# EAGLE board single valve board (EAGLE 9.2.2)
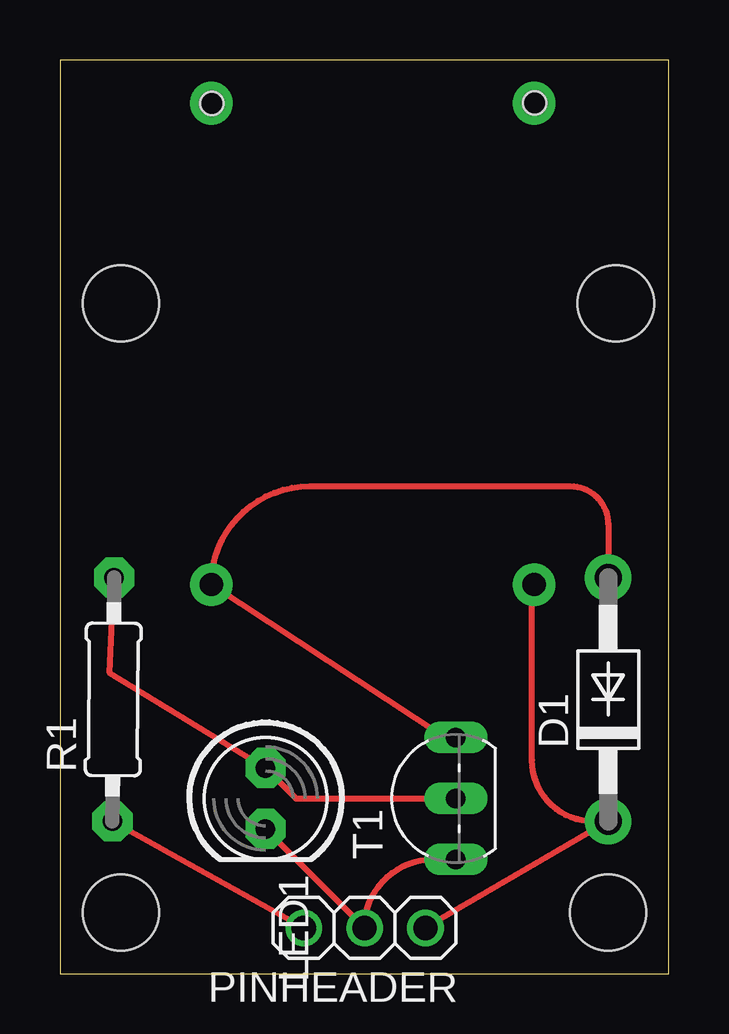
[diagram p0: board, top side]
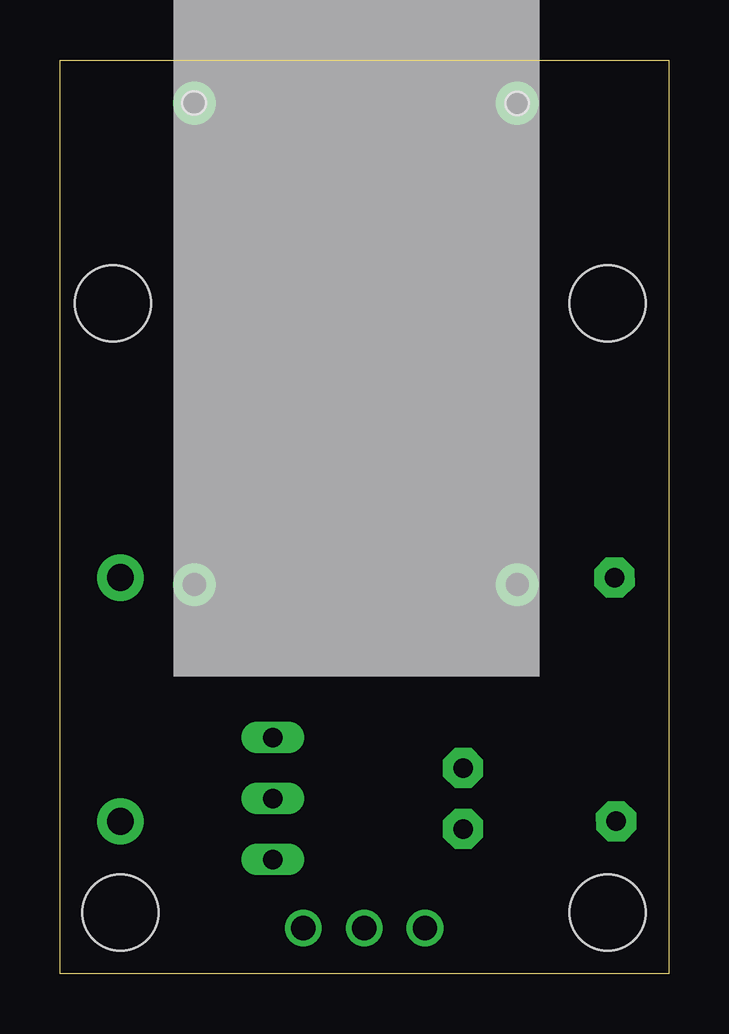
[diagram p1: board, bottom side, seen from below]

Size 25.38 x 38.09 mm. Coordinates in mm from the lower left corner, seen from the top.
Outline: 0,0 25.38,0 25.38,38.09 0,38.09 0,0
Copper layers (1*16): Top 0.035mm / dielectric 1.5mm / Bottom 0.035mm
Design rules "default": minimum track width 6mil, minimum drill 0.35mm, track to track 6mil, track to pad 6mil, pad to pad 6mil, via to via 6mil, smd to smd 6mil, copper to edge 40mil, drill to drill 6mil, minimum pad ring 10mil, minimum via ring 8mil, stop-mask expansion 4mil, vias tented up to drill 0mil, thermal gap 10mil
Holes 3.17 mm at 2.54,27.94 23.18,27.94 22.86,2.54 2.54,2.54
Holes 0.97 mm at 6.32,36.27 19.79,36.3

## Footprints (pad centres in the part's own frame; a part is rotated, then mirrored left to right if it is on the bottom)
DO41-10 = drill 1.118 pad 1.93: A 5.08,0; C -5.08,0
LED5MM = drill 0.813 pad 1.676 octagon: A -1.27,0; K 1.27,0
1X03 = drill 1.016: 1 -2.54,0; 2 0,0; 3 2.54,0
0207/10 = drill 0.813 pad 1.676 octagon: 1 -5.08,0; 2 5.08,0
VALVTEST2 = drill 0.965 pad 1.778: PAD10 -10.135,6.756; PAD11 -10.135,-6.706; PAD12 9.931,-6.706; PAD13 9.931,6.756
TO92-EBC-OVAL = drill 0.813 long: B 0,-1.27; C 2.54,-1.27; E -2.54,-1.27

## Placement (x,y rotation side)
D1  1N4004  [DO41-10]  22.86,11.43 90 top
LED1  [LED5MM]  8.57,7.3 270 top
PINHEADER  [1X03]  12.7,1.91 180 top
R1  220  [0207/10]  2.22,11.43 89.6 top
SOLENOID1  SOLENOID1  [VALVTEST2]  13.02,26.35 90 bottom
T1  2N2222  [TO92-EBC-OVAL]  15.24,7.3 90 top

## Library data of the parts
D1 LED1 PINHEADER R1 T1 = adafruit
SOLENOID1 = local eagle library

## Nets
5V: D1.C PINHEADER.1 SOLENOID1.PAD10
CNTRLSIG1: PINHEADER.3 R1.1
GND: LED1.K PINHEADER.2 T1.E
N$1: D1.A SOLENOID1.PAD11 T1.C
N$2: LED1.A R1.2 T1.B

## Tracks (layer width: path | path; a pad name or v marks a point on that pad's centre or on a via)
5V
  Top 0.254: PINHEADER.1 D1.C 22.23,6.35 arc-90 19.68,8.89 19.68,16.45 arc-90 19.77,16.54
CNTRLSIG1
  Top 0.254: PINHEADER.3 R1.1
GND
  Top 0.254: T1.E 15.56,4.76 arc90 PINHEADER.2 LED1.K
N$1
  Top 0.254: T1.C 16.03,9.84 SOLENOID1.PAD11 arc-90 10.41,20.32 21.27,20.32 arc-90 22.86,18.73 D1.A
N$2
  Top 0.254: R1.2 2.08,12.53 LED1.A 9.84,7.3 T1.B